# Altium PCB ebit_ad.PcbDoc (part 3 of 6)
Units mil, origin at the board's own origin, x right, y up, seen from the top; angles counter-clockwise.
Board outline 3958.82 x 3829.88 mil, 4 copper layers (Top Layer, MidLayer1, MidLayer2, Bottom Layer); 565 components, 392 nets, 1912 pads, 1242 vias.
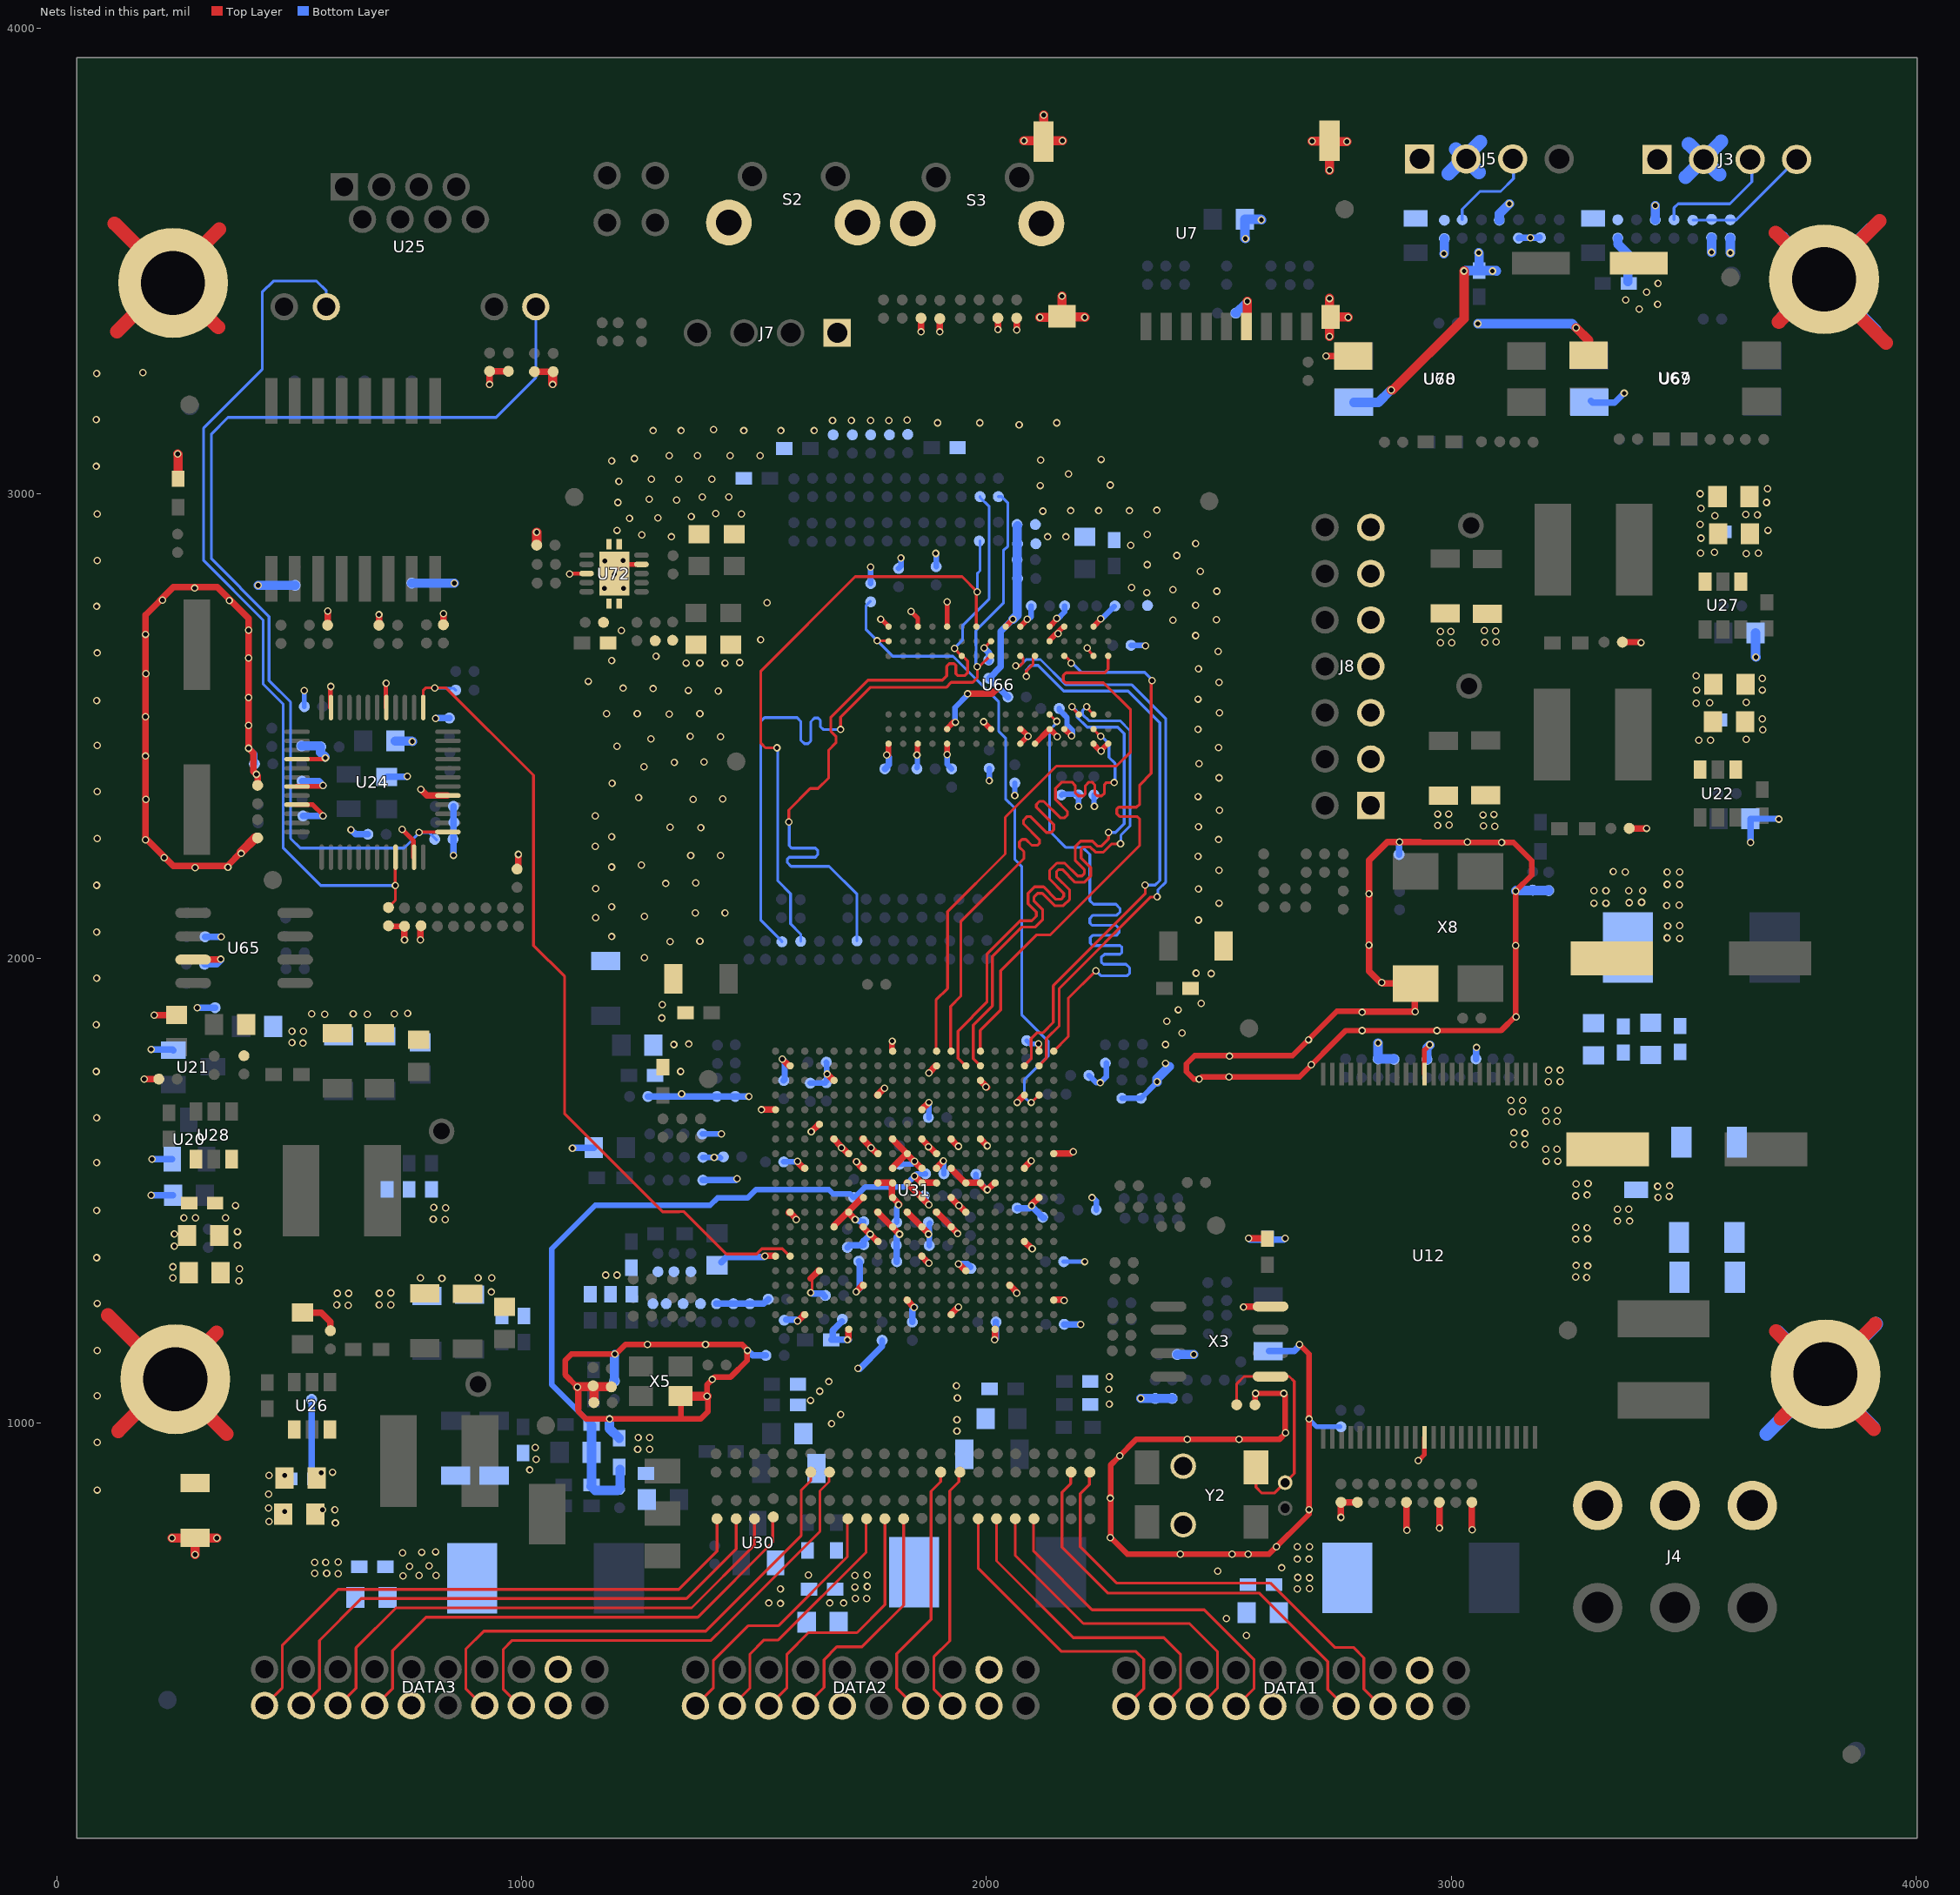
[diagram p5: the nets of this part, all layers, seen from the top]

## Via types
v1: diameter 16, hole 10, Top Layer to Bottom Layer, 1242 vias

## Nets (pads, with @x,y where several pads share a name; then routed paths per layer and width w, separated by ;. In a path a pad name is that pad's centre, name@x,y a point inside that pad or via, vN(x,y) a via of type N, cw(c..) or ccw(c..) an arc to the next point about the centre after c; other vN are vias at no path point) (continued)
DDR-DQ14_0: U31.H1 U66.B8 | length 1300.3
  Top Layer w6: U31.H1@1923.13,1800.2 1923.13,1896.55 1944.88,1918.31 1944.88,2078.74 2080.71,2214.57 2080.71,2229.33 2070.87,2239.17 2070.87,2250 2076.77,2255.91 2084.65,2255.91 2097.44,2243.11 2110.24,2243.11 2114.17,2247.05 2114.17,2254.92 2079.72,2289.37 2079.72,2297.24 2087.6,2305.12 2094.49,2305.12 2128.94,2270.67 2138.78,2270.67 2144.69,2276.57 2144.69,2287.4 2107.28,2324.8 2107.28,2330.71 2114.17,2337.6 2123.03,2337.6 2158.46,2302.17 2168.31,2302.17 2174.21,2308.07 2174.21,2315.94 2148.62,2341.54 2148.62,2365.16 2162.4,2378.94 2184.06,2378.94 2190.95,2372.05 2190.95,2356.3 2197.83,2349.41 2208.66,2349.41 2212.6,2353.35 2212.6,2371.06 2220.47,2378.94 2227.36,2378.94 2233.27,2373.03 2233.27,2354.33 2238.19,2349.41 2248.03,2349.41 2253.94,2355.31 2253.94,2374.02 2257.87,2377.95 v1(2274.61,2377.95) ; U66.B8@2230.32,2492.13 2245.08,2477.36 v1(2246.06,2477.36)
  Bottom Layer w6: v1(2246.06,2477.36) 2248.03,2477.36 2263.78,2461.61 2263.78,2432.09 2276.58,2419.29 v1@2276.58,2379.92
DDR-DQ15_0: U31.J1 U66.A3 | length 1294.5
  Top Layer w6: U31.J1@1891.47,1800.2 1891.47,1910.17 1916.34,1935.04 1916.34,2100.39 2040.35,2224.41 2040.35,2303.15 2150.59,2413.39 2279.53,2413.39 2310.04,2443.9 2310.04,2534.45 2251.97,2592.52 2170.28,2592.52 2165.35,2597.44 2165.35,2608.27 2171.26,2614.17 2253.94,2614.17 2261.81,2622.05 U66.A3@2261.81,2649.61
DDR-LDM_0: U31.A1 U66.E7 | length 1291.7
  Top Layer w6: U66.E7@2135.83,2524.61 2150.59,2509.84 v1(2151.58,2509.84) ; U31.A1@2144.69,1800.2 2176.18,1831.69 2176.18,1914.37 v1(2235.24,1973.42)
  Bottom Layer w6: v1@2150.59,2505.91 2135.83,2491.14 2135.83,2273.62 2171.26,2238.19 2207.68,2238.19 2222.44,2223.42 2222.44,2124.02 2230.32,2116.14 2278.54,2116.14 2287.4,2107.28 2287.4,2099.41 2280.51,2092.52 2229.33,2092.52 2222.44,2085.63 2222.44,2075.79 2227.36,2070.87 2278.54,2070.87 2285.43,2063.98 2285.43,2055.12 2279.53,2049.21 2228.35,2049.21 2223.43,2044.29 2223.43,2032.48 2228.35,2027.56 2287.4,2027.56 2291.34,2023.62 2291.34,2012.79 2287.4,2008.86 2253.94,2008.86 2247.05,2001.97 2247.05,1992.13 2251.97,1987.2 2300.2,1987.2 2308.07,1979.33 2308.07,1967.52 2303.15,1962.6 2246.06,1962.6 v1(2235.24,1973.42)
DDR-LDQS#_0: U31.B2 U66.G3 | length 1283.6
  Top Layer w6: v1(2062.99,2628.94) 2071.85,2628.94 2078.74,2635.83 2078.74,2646.65 U66.G3@2072.84,2652.56 ; U31.B2@2113.03,1768.75 2128.94,1784.66 2128.94,1826.77 2156.5,1854.33 2156.5,1935.04 2353.35,2131.89 v1(2367.13,2131.89)
  Bottom Layer w6: v1(2062.99,2628.94) 2071.85,2628.94 2085.63,2642.72 2116.14,2642.72 2170.28,2588.58 2312.01,2588.58 2385.83,2514.76 2385.83,2164.37 2369.09,2147.64 v1@2369.09,2133.86
DDR-LDQS_0: U31.C2 U66.F3 | length 1286.6
  Top Layer w6: U31.C2@2081.38,1768.75 2096.46,1783.83 2096.46,1809.07 2096.2,1809.32 2096.2,1827.5 2108.27,1839.57 2121.06,1839.57 2143.7,1862.2 2143.7,1940.94 2341.54,2138.78 v1(2341.54,2157.48) ; v1(2085.63,2606.3) 2085.63,2618.11 2100.39,2632.87 2100.39,2648.62 U66.F3@2104.33,2652.56
  Bottom Layer w6: v1@2085.63,2609.25 2085.63,2620.08 2095.47,2629.92 2111.22,2629.92 2166.34,2574.8 2305.12,2574.8 2373.03,2506.89 2373.03,2167.32 2363.19,2157.48 v1(2341.54,2157.48)
DDR-ODT_0: R2513.2 R2642.1 U66.K1 | length 1381.3
  Top Layer w6: v1(1549.21,2452.76) 1524.61,2452.76 1514.76,2462.6 1514.76,2618.11 1717.52,2820.87 1947.83,2820.87 v1(1980.32,2788.39) 1978.35,2786.42 U66.K1@1978.35,2713.58
  Bottom Layer w6: v1@1550.2,2454.72 1551.18,2453.74 1551.18,2166.34 1578.74,2138.78 1578.74,2073.82 1600.39,2052.16 R2513.2@1600.39,2036.42 ; v1@1982.28,2791.34 1980.32,2793.31 1980.32,2827.76 1986.22,2833.66 R2642.1@1986.22,2897.64
DDR-RAS_0: R2532.2 R2639.1 U66.J3 | length 1607.3
  Top Layer w6: v1(1686.02,2492.13) 1686.02,2518.7 1750,2582.68 1913.39,2582.68 1924.21,2593.5 1970.47,2593.5 1980.32,2603.35 v1(1980.32,2626.97) 1984.25,2626.97 U66.J3@2009.84,2652.56
  Bottom Layer w6: R2532.2@1560.04,2035.43 1560.04,2036.42 1514.76,2081.69 1514.76,2509.84 1522.64,2517.72 1592.52,2517.72 1600.39,2509.84 1600.39,2469.49 1608.27,2461.61 1616.14,2461.61 1622.05,2467.52 1622.05,2508.86 1629.92,2516.73 1637.8,2516.73 1642.72,2511.81 1642.72,2498.03 1648.62,2492.13 v1@1682.09,2492.13 ; v1@1980.32,2624.02 1977.36,2626.97 1977.36,2659.46 1977.61,2659.71 1977.61,2672.97 1977.36,2673.22 1977.36,2704.72 2036.42,2763.78 2036.42,2876.97 2046.26,2886.81 2046.26,2979.33 2032.48,2993.11 R2639.1@2025.59,2993.11
DDR-RESET_0: R2645.1 U31.B4 U66.T2 | length 1397.2
  Top Layer w6: v1(1764.76,2683.07) 1788.39,2683.07 U66.T2@1789.37,2684.05 ; v1(2096.46,1689.96) 2097.13,1689.96 U31.B4@2113.03,1705.86
  Bottom Layer w6: R2645.1@1750,2767.72 1741.14,2758.86 1741.14,2706.69 1798.23,2649.61 1928.15,2649.61 2026.58,2551.18 2026.58,2488.19 2041.09,2473.68 2041.09,2342.77 2061.02,2322.83 2061.02,2212.6 2075.79,2197.83 2075.79,1878.94 2132.87,1821.85 2132.87,1789.37 2081.44,1737.94 2081.44,1702.02 2093.5,1689.96 v1(2096.46,1689.96)
DDR-UDM_0: U31.F1 U66.D3 | length 1265.2
  Top Layer w6: U31.F1@1986.43,1800.2 1986.43,1844.7 2030.51,1888.78 2030.51,1973.42 2107.28,2050.2 2136.81,2050.2 2329.72,2243.11 2329.72,2299.21 2323.82,2305.12 2286.42,2305.12 2280.51,2311.02 2280.51,2320.87 2284.45,2324.8 2322.83,2324.8 2329.72,2331.69 2329.72,2373.03 2354.33,2397.64 v1@2354.33,2596.46 ; U66.D3@2167.32,2652.56 2182.09,2637.8 v1(2182.09,2634.84)
  Bottom Layer w6: v1(2182.09,2634.84) 2185.04,2634.84 2204.72,2615.16 2340.55,2615.16 v1@2357.28,2598.42
  other v1: 2356.3,2597.44
DDR-UDQS#_0: U31.F2 U66.B7 | length 1284.8
  Top Layer w6: U31.F2@1986.43,1768.75 1971.46,1783.72 1971.46,1856.3 2012.8,1897.64 2012.8,2003.94 2075.79,2066.93 2104.33,2066.93 2121.06,2083.66 2121.06,2104.33 2102.36,2123.03 2102.36,2131.89 2110.24,2139.76 2120.08,2139.76 2146.65,2113.19 2165.35,2113.19 2179.13,2126.97 2179.13,2146.65 2150.59,2175.2 2150.59,2186.02 2155.51,2190.94 2163.39,2190.94 2190.95,2163.39 2210.63,2163.39 2224.41,2177.16 2224.41,2194.88 2203.74,2215.55 2203.74,2235.24 2207.68,2239.17 2223.43,2239.17 2234.25,2228.35 2251.97,2228.35 2269.69,2246.06 v1@2286.42,2246.06 ; v1(2215.55,2541.34) 2215.55,2539.37 U66.B7@2230.32,2524.61
  Bottom Layer w6: v1(2215.55,2541.34) 2206.69,2532.48 2206.69,2524.61 2220.47,2510.83 2287.4,2510.83 2309.06,2489.17 2309.06,2284.45 2289.37,2264.76 v1@2289.37,2251.97
  other v1: 2288.39,2246.06
DDR-UDQS_0: U31.G2 U66.C7 | length 1294.4
  Top Layer w6: U31.G2@1954.78,1768.75 1938.72,1784.8 1938.72,1843.25 2000.98,1905.51 2000.98,2008.86 2072.83,2080.71 2097.44,2080.71 2107.28,2090.55 2107.28,2099.41 2089.57,2117.13 2089.57,2139.76 2103.35,2153.54 2123.03,2153.54 2149.61,2126.97 2160.43,2126.97 2166.34,2132.87 2166.34,2139.76 2135.83,2170.28 2135.83,2188.98 2151.57,2204.72 2168.31,2204.72 2195.87,2177.17 2205.71,2177.17 2210.63,2182.09 2210.63,2190.94 2190.95,2210.63 2190.95,2240.16 2202.76,2251.97 2228.35,2251.97 2239.17,2241.14 2247.05,2241.14 2262.8,2256.89 v1(2262.8,2270.67) ; v1(2184.06,2541.34) 2184.06,2539.37 U66.C7@2198.82,2524.61
  Bottom Layer w6: v1@2187.01,2539.37 2194.88,2531.5 2194.88,2518.7 2216.54,2497.05 2282.48,2497.05 2296.26,2483.27 2296.26,2289.37 2277.56,2270.67 v1(2262.8,2270.67)
DDR-WE_0: R2534.2 R2641.1 U66.L3 | length 1565.7
  Top Layer w6: v1(1574.8,2293.31) 1574.8,2318.9 1621.06,2365.16 1637.8,2365.16 1660.43,2387.79 1660.43,2447.83 1676.18,2463.58 1676.18,2477.36 1665.35,2488.19 1665.35,2518.7 1745.08,2598.42 1905.51,2598.42 1914.37,2607.28 1914.37,2627.95 1920.28,2633.86 1930.12,2633.86 1934.06,2629.92 1934.06,2612.2 1937.99,2608.27 1953.74,2608.27 1959.65,2614.17 1959.65,2639.76 1946.85,2652.56 1944.88,2652.56 v1(1931.1,2666.34)
  Bottom Layer w6: v1@1575.79,2290.35 1575.79,2242.13 1580.71,2237.2 1631.89,2237.2 1636.81,2232.28 1636.81,2222.44 1631.89,2217.52 1575.79,2217.52 1571.85,2213.58 1571.85,2205.71 1579.72,2197.83 1661.42,2197.83 1721.46,2137.79 R2534.2@1721.46,2037.4 ; v1@1932.09,2668.31 1948.82,2685.04 1948.82,2716.54 2005.91,2773.62 2005.91,2971.46 1986.22,2991.14 R2641.1@1986.22,2993.11
GND: C68.2 C69.2 C71.1 C73.1 C82.1 C93.1 C94.1 C147.2 C289.1 C290.1 C291.2 C292.2 C293.1 C294.1 C306.2 C307.2 C308.2 C309.2 C310.2 C319.2 C320.2 C321.2 C322.2 C323.2 C325.1 C362.1 C363.1 C364.1 C366.2 C367.2 C368.2 C369.2 C370.2 C371.2 C372.2 C373.2 C374.2 C375.2 C376.2 C377.1 C379.1 C379A.1 C380.2 C382.2 C383.2 C384.1 C385.2 C386.2 C387.2 C389.1 C390.1 C391.2 C392.1 C394.1 C395.1 C396.2 C397.2 C398.1 C399.2 C401.1 C402.2 C403.1 C538.2 C625.2 C626.2 C628.2 C659.1 C660.1 C663.2 C665.2 C666.1 C667.2 C668.1 C669.1 C670.2 C671.1 C672.1 C673.2 C674.1 C845.1 C846.1 C1887.2 C1987.1 C2250.1 C2269.2 C2280.2 C2285.1 C2287.1 C2288.1 C2291.1 C2292.2 C2293.2 C2294.2 C2295.1 C2296.2 C2297.1 C2298.2 C2299.1 C2302.2 C2304.1 C2305.1 C2306.1 C2307.2 C2308.1 C2309.1 C2310.2 C2312.1 C2313.2 C2314.2 C2315.2 C2316.2 C2317.1 C2318.2 C2319.1 C2320.2 C2321.1 C2322.1 C2323.1 C2324.2 C2325.2 C2326.2 C2327.2 C2328.1 C2329.1 C2330.2 C2331.2 C2332.1 C2333.1 C2334.1 C2335.2 C2336.1 C2337.2 C2338.2 C2339.2 C2340.1 C2341.1 C2342.2 C2343.1 C2344.2 C2345.2 C2346.2 C2347.1 C2349.1 C2349A.2 C2350.1 C2351.2 C2352.2 C2353.1 C2354.2 C2355.2 C2356.1 C2357.1 C2358.2 C2359.1 C2360.1 C2361.1 C2362.2 C2363.1 C2365.1 C2366.2 C2367.2 C2368.2 C2369.2 C2370.2 C2371.2 C2372.2 C2373.1 C2374.2 C2375.2 C2376.2 C2377.1 C2378.2 C2379.2 C2381.1 C2382.2 C2384.1 C2394.2 C2395.2 C2396.1 C2397.1 C2398.2 C2399.2 C2400.1 C2401.2 C2402.1 C2403.2 C2404.2 C2405.2 C2406.2 C2407.2 C2408.2 C2409.2 C2410.1 DATA1.3 DATA1.4 DATA1.12 DATA2.3 DATA2.4 DATA2.12 DATA3.3 DATA3.4 DATA3.12 FB14.1 J7.1 J8.1 J8.3 J8.5 J8.7 J8.9 J8.11 J8.13 L36.2 LED1.2 LED4.2 R120A.1 R244.1 R246.1 R248.1 R277.1 R1336.2 R1381.1 R1383.1 R1386.1 R1389.1 R1390.1 R1392.1 R1393.2 R1396.2 R1412.1 R1415.2 R1418.2 R1421.2 R1483.2 R1497.1 R1498.1 R1499.1 R1949.1 R2161.1 R2389.2 R2433.2 R2455.2 R2456.2 R2459.1 R2512.1 R2538.2 R2541.2 R2558.2 R2560.2 R2584.2 R2585.1 R2586.2 R2587.2 R2588.1 R2590.2 R2598.2 R2616.2 R2645.2 R2648.1 S2.1 S2.2 S3.1 S3.2 U7.6 U7.10 U7.11 U7.12 U7.13 U12.13 U12.36 U20.2 U21.2 U22.1 U24.11 U24.17 U24.29 U24.35 U24.40 U24.43 U24.45 U26.1 U27.1 U28.1 U30.1 U31.A8 U31.A18 U31.B1 U31.B11 U31.C4 U31.C9 U31.C14 U31.D17 U31.E10 U31.E20 U31.F3 U31.F7 U31.F10 U31.G10 U31.G12 U31.G16 U31.H7 U31.H9 U31.H11 U31.H13 U31.H19 U31.J2 U31.J8 U31.J12 U31.K5 U31.K7 U31.K9 U31.K11 U31.K13 U31.K15 U31.L8 U31.L10 U31.L12 U31.L18 U31.M1 U31.M7 U31.M9 U31.M10 U31.M11 U31.M13 U31.N4 U31.N8 U31.N10 U31.N12 U31.N14 U31.P7 U31.P9 U31.P11 U31.P13 U31.P17 U31.R8 U31.R12 U31.R20 U31.T3 U31.T7 U31.T13 U31.U6 U31.U16 U31.V9 U31.V19 U31.W2 U31.W12 U31.Y5 U31.Y15 U65.3 U66.A9 U66.B1 U66.B3 U66.B9 U66.D1 U66.D8 U66.E1 U66.E2 U66.E8 U66.F9 U66.G1 U66.G8 U66.G9 U66.J2 U66.J8 U66.M1 U66.M9 U66.P1 U66.P9 U66.T1 U66.T9 U67.3 U68.3 U72.4 U72.8 U72.11 U72.12 U72.13 U72.14 U72.15 X3.4 X5.4 X8.2 Y2.5 Y2.6 | length 16151
  Top Layer w6: v1@1622.05,1283.46 v1@1625,1280.51 ; v1@1625,1284 1625,1311.56 ; v1(1995.08,2667.32) 2009.84,2682.09 U66.J2@2009.84,2684.05 ; v1@2215.55,2666.34 2229.33,2652.56 U66.B3@2230.32,2652.56
  Top Layer w8: v1(1103.35,2826.77) 1104.33,2827.76 U72.8@1138.78,2827.76
  Top Layer w10: U24.45@515.75,2330.44 550.47,2330.44 572.83,2308.07 v1(572.83,2306.1) ; U24.43@515.75,2369.63 570.42,2369.63 v1(572.83,2372.05) ; U24.40@515.75,2428.42 575.07,2428.42 v1(577.76,2431.1) ; U24.35@588.76,2539.37 588.76,2583.84 v1(589.57,2584.65) ; U24.29@707.95,2539.37 707.95,2590.82 v1(708.66,2591.53) ; v1(743.11,2277.56) 743.11,2276.57 767.54,2252.15 U24.11@767.54,2217.52 ; U72.15@1218.5,2847.44 U72.4@1256.89,2847.44 ; U31.R20@1701.57,1202.76 U31.R20@1702.76,1201.57 ; v1(1772.64,2729.33) 1773.62,2729.33 U66.T1@1789.37,2713.58 ; v1(1837.6,2746.06) 1852.36,2731.3 U66.P1@1852.36,2713.58 ; v1@1914.37,2767.72 v1(1915.35,2766.73) U66.M1@1915.36,2713.58 ; v1(2929.13,919.29) 2942.36,932.51 U12.36@2942.36,969.49 ; U12.13@2942.36,1750.98 2942.36,1802.59 v1(2953.74,1813.98)
  Top Layer w12: R1390.1@713.58,2069.88 714.57,2068.9 R1392.1@748.03,2068.9 ; v1@1119.09,1078.74 1093.5,1104.33 1093.5,1134.84 1107.28,1148.62 1202.76,1148.62 1223.43,1169.29 1474.41,1169.29 1485.24,1158.46 1485.24,1134.84 1449.8,1099.41 1415.35,1099.41 1398.62,1082.68 v1(1398.62,1058.07) ; 1122.05,1030.51 1122.05,1025.59 1138.78,1008.86 1343.57,1008.86 1384.84,1008.86 1400.59,1024.61 1400.59,1055.12 v1@1398.62,1057.09 ; X5.4@1341.54,1053.15 X5.4@1343.57,1051.12 ; 1342.52,1008.86 X5.4@1342.52,1051.12 ; v1(1785.52,2437.13) 1788.27,2437.13 1788.39,2437.01 1789,2437.62 1789,2449.14 1789.37,2449.51 U66.T9@1789.37,2461.61 ; U31.M1@1796.52,1800.2 1796.52,1821.13 v1@1797.24,1821.85 ; v1(1850.48,2437.13) 1851.26,2437.13 1851.38,2437.01 1851.38,2460.63 U66.P9@1852.36,2461.61 ; v1(1915.35,2437.99) U66.M9@1915.36,2461.61 ; v1@1995.08,2509.84 1995.08,2506.89 U66.J8@2009.84,2492.13 ; U66.G8@2071.85,2493.11 2074.8,2493.11 2089.57,2478.35 U66.G9@2072.84,2461.61 ; U66.G1@2072.84,2713.58 2087.6,2728.35 v1(2087.6,2729.33) ; U66.F9@2104.33,2461.61 2134.84,2492.13 2137.8,2492.13 v1@2151.58,2478.35 ; U31.B1@2113.03,1800.2 v1@2113.03,1815.12 ; U66.E2@2135.83,2684.05 2165.35,2713.58 U66.D1@2167.32,2713.58 ; U66.E1@2135.83,2713.58 2151.58,2729.33 v1(2151.57,2731.3) ; U66.D8@2167.32,2492.13 2169.29,2492.13 v1(2183.07,2478.35) ; U66.B9@2230.32,2461.61 2230.32,2460.63 2245.08,2445.87 2260.83,2461.61 U66.A9@2261.81,2461.61 ; U66.B1@2230.32,2713.58 2246.06,2729.33 v1(2246.06,2730.31) ; C69.2@2577.76,1039.37 2577.76,1062.99 v1(2578.74,1063.98) v1(2639.76,1063.98) 2642.72,1061.02 2642.72,977.36 2630.91,965.55 2322.83,965.55 2283.46,926.18 2267.72,910.43 2267.72,753.94 2303.15,718.5 2608.27,718.5 2693.9,804.13 2693.9,1148.62 v1(2673.23,1169.29) ; v1@2805.12,1885.83 2753.94,1885.83 2658.46,1790.35 2447.83,1790.35 2430.12,1772.64 2430.12,1755.91 2445.87,1740.16 v1(2457.68,1740.16) 2462.6,1745.08 2673.23,1745.08 2772.64,1844.49 3107.28,1844.49 3138.78,1875.98 v1(3138.78,2144.68) 3173.23,2179.13 3173.23,2209.65 3133.86,2249.02 2934.06,2249.02 2933.07,2250
  Top Layer w14: v1(209.65,1877.95) C628.2@257.87,1877.95 ; U65.3@293.31,1997.05 351.38,1997.05 v1(352.36,1998.03) ; v1@396.65,2228.35 367.13,2198.82 250.98,2198.82 190.94,2258.86 190.94,2738.19 250.98,2798.23 345.47,2798.23 412.4,2731.3 v1(412.4,2451.77) 423.23,2440.94 423.23,2401.57 v1(429.13,2395.67) 432.09,2392.72 C380.2@432.09,2372.05 ; C386.2@527.56,1237.2 568.9,1237.2 588.58,1217.52 R1415.2@588.58,1198.82 ; C366.2@582.68,2716.54 v1(582.68,2747.05) ; C372.2@692.91,2716.54 v1(692.91,2739.17) ; v1(748.03,2039.37) R1392.1@748.03,2068.9 ; v1(782.48,2039.37) R1386.1@782.48,2069.88 ; v1(783.46,2363.19) 796.62,2350.04 U24.17@840.55,2350.04 ; R1393.2@831.69,2717.52 v1(831.69,2741.14) ; v1@930.12,3233.27 v1(931.1,3234.25) R1389.1@931.1,3262.79 C659.1@970.47,3262.79 ; R2560.2@993.11,2191.93 v1(993.11,2223.42) ; C660.1@1025.59,3261.81 R1412.1@1067.91,3261.81 ; v1(1120.08,1077.76) 1122.05,1075.79 1122.05,1030.51 ; v1(1515.75,1674.21) 1515.96,1674.42 U31.Y5@1543.31,1674.42 ; v1@1521.65,1359.25 1522.38,1359.98 U31.Y15@1543.31,1359.98 ; v1(1561.02,1783.46) 1561.02,1782.69 U31.W2@1574.96,1768.75 ; U31.W12@1575,1453 U31.W12@1576.24,1453 ; U31.W12@1576.2,1454.31 v1@1591.54,1438.98 ; v1@1593.5,1218.5 1606.61,1231.61 U31.V19@1606.61,1234.2 ; v1(1593.5,1562.99) 1593.5,1561.75 U31.V9@1606.61,1548.64 ; 1622.05,1311.02 1638.26,1327.24 U31.U16@1638.26,1328.53 ; v1(1623.03,1626.97) 1638.26,1642.2 U31.U6@1638.26,1642.98 ; v1(1657.48,1750.98) 1669.91,1738.55 U31.T3@1669.91,1737.31 ; U31.T7@1669.91,1611.53 1670.95,1611.53 1687.99,1594.49 1701.57,1580.91 U31.R8@1701.57,1580.09 ; U31.T13@1672.24,1423.23 1672.24,1424.78 U31.P11@1733.22,1485.75 ; U31.R12@1701.57,1454.31 1716.9,1438.98 v1@1717.52,1438.98 ; v1@1702.76,1180.12 U31.R20@1702.76,1201.57 ; v1@1718.5,1562.99 1718.87,1562.99 U31.P9@1733.22,1548.64 ; v1(1719.49,1282.48) 1733.22,1296.21 U31.P17@1733.22,1297.09 ; U31.P13@1733.22,1422.87 1763.37,1392.72 U31.N14@1764.76,1392.72 ; U31.P7@1733.22,1611.53 1750.98,1593.76 1750.98,1593.5 1764.4,1580.09 U31.N8@1764.87,1580.09 ; U31.N12@1764.87,1454.31 1812.68,1406.5 v1(1812.99,1406.5) ; U31.N10@1764.87,1517.2 1796.78,1517.2 U31.M10@1797.24,1516.73 ; U31.N4@1764.87,1705.86 1779.48,1720.47 v1@1779.53,1720.47 ; U31.M10@1796.52,1517.2 1796.52,1486.94 v1@1812.99,1470.47 ; U31.M9@1796.52,1548.64 1796.73,1548.64 U31.L8@1828.17,1580.09 ; U31.M7@1796.52,1611.53 1859.41,1548.64 U31.K9@1859.82,1548.64 ; U31.L18@1828.17,1265.65 1828.17,1265.33 v1(1844.49,1249.02) ; U31.L12@1828.17,1454.31 1875,1407.48 v1(1875,1406.5) ; U31.L10@1828.17,1517.2 1875.88,1469.49 v1(1875.98,1469.49) ; v1(1859.25,3347.44) R120A.1@1859.25,3376.97 ; U31.K15@1859.82,1359.98 1875.31,1344.49 v1(1875.98,1344.49) ; U31.K7@1859.82,1611.53 1890.65,1580.71 U31.J8@1890.75,1580.71 ; U31.K5@1859.82,1674.42 1860.44,1674.42 v1(1875.98,1689.96) ; v1(1875.98,1752.95) 1875.98,1753.26 U31.J2@1891.47,1768.75 ; U31.J12@1891.47,1454.31 1892.15,1454.31 v1@1937.5,1408.96 ; v1(1899.61,3347.44) C73.1@1899.61,3375.98 ; U31.H19@1923.13,1234.2 1923.18,1234.2 v1@1938.98,1250 ; U31.H11@1923.13,1485.75 1937.99,1470.89 1937.99,1469.49 1939.6,1469.49 U31.G12@1954.78,1454.31 ; U31.H9@1923.13,1548.64 1954.05,1517.72 1984.25,1517.72 2000,1501.97 v1(2001.97,1501.97) U31.E10@2016.73,1516.73 ; U31.H7@1923.13,1611.53 1939.18,1595.47 v1(1939.96,1595.47) ; v1(1939.96,1342.52) 1940.79,1342.52 U31.G16@1954.78,1328.53 ; U31.F7@1986.43,1611.53 2001.5,1596.46 v1(2001.97,1596.46) ; U31.F3@1986.43,1737.31 2001.3,1722.44 v1@2001.97,1722.44 ; v1(2017.72,1179.13) 2018.08,1179.5 U31.E20@2018.08,1202.76 ; v1(2024.61,3352.36) C2410.1@2024.61,3376.97 ; U31.D17@2049.73,1297.09 2065.95,1280.88 v1@2065.95,1280.51 ; v1(2064.96,3351.38) R2648.1@2064.96,3376.97 ; v1(2065.94,1689.96) 2065.95,1690.43 U31.C4@2081.38,1705.86 ; U31.C14@2081.38,1391.42 2097.8,1375 v1(2098.42,1375) ; U31.C9@2081.38,1548.64 2081.38,1548.9 v1(2096.46,1563.98) ; v1@2097.44,1470.47 2112.72,1485.75 U31.B11@2113.03,1485.75 ; U31.A18@2144.69,1265.65 2167.22,1265.65 v1@2167.32,1265.75 ; U31.A8@2144.69,1580.09 2181.47,1580.09 v1@2186.02,1584.65 ; v1(2553.15,1250) 2554.13,1250.98 X3.4@2611.22,1250.98 ; v1(2563.98,1397.64) 2603.35,1397.64 C670.2@2604.33,1396.65 ; v1(2730.31,3295.28) U68.3@2789.37,3295.28 ; v1(2762.8,797.24) R248.1@2762.8,829.72 R2588.1@2798.23,829.72 ; v1@2807.09,1884.84 v1(2922.24,1884.84) 2921.26,1885.83 2921.26,1943.9 X8.2@2923.23,1945.87 2852.36,1945.87 v1(2850.39,1947.83) 2847.44,1947.83 2822.83,1972.44 2822.83,2210.63 2862.2,2250 2933.07,2250 ; R2585.1@2903.54,829.72 2903.54,770.67 v1(2904.53,769.68) ; v1(2974.41,774.61) R246.1@2974.41,829.72 ; R244.1@3044.29,829.72 3044.29,771.65 v1(3045.28,770.67) ; R1418.2@3368.11,2680.12 3407.48,2680.12 v1(3408.46,2679.13) ; R1336.2@3382.87,2279.53 v1(3420.28,2279.53)
  Top Layer w20: v1(248.03,752.95) C325.1@297.24,752.95 ; v1(259.84,3084.65) 260.83,3083.66 LED4.2@260.83,3031.5 ; v1(297.24,717.52) C325.1@297.24,752.95 ; v1(344.49,752.95) C325.1@297.24,752.95 ; v1@396.65,2228.35 427.17,2258.86 C377.1@432.09,2258.86 ; C2400.1@1032.48,2888.78 v1(1032.48,2916.34) ; v1@1066.93,3236.22 1066.93,3260.83 R1412.1@1067.91,3261.81 ; v1(1120.08,1077.76) 1121.06,1078.74 C362.1@1193.9,1078.74 ; C364.1@1154.53,1078.74 1155.51,1077.76 R277.1@1155.51,1044.29 ; X5.4@1341.54,1058.07 v1(1398.62,1058.07) ; v1(2080.71,3758.86) 2121.06,3758.86 U7.12@2123.03,3756.89 ; v1(2115.16,3378.94) 2161.42,3378.94 U7.13@2162.4,3379.92 ; v1(2123.03,3813.98) U7.12@2123.03,3756.89 ; v1(2162.4,3424.21) U7.13@2162.4,3379.92 ; v1(2163.39,3758.86) 2125,3758.86 U7.12@2123.03,3756.89 ; v1(2211.61,3378.94) 2210.63,3379.92 U7.13@2162.4,3379.92 ; U7.6@2559.42,3359.25 2561.02,3360.85 v1(2561.02,3413.39) ; v1(2700.79,3757.87) 2737.2,3757.87 U7.11@2738.19,3758.86 ; v1(2738.19,3337.6) 2738.19,3377.95 U7.10@2740.16,3379.92 ; v1(2738.19,3419.29) 2738.19,3381.89 U7.10@2740.16,3379.92 ; v1(2738.19,3694.88) U7.11@2738.19,3758.86 ; v1(2775.59,3756.89) 2740.16,3756.89 U7.11@2738.19,3758.86 ; v1(2778.54,3378.94) 2777.56,3379.92 U7.10@2740.16,3379.92 ; v1(3268.7,3356.3) 3295.28,3329.72 U67.3@3295.28,3297.24
  Bottom Layer w10: C367.2@532.48,2541.34 v1(532.48,2575.79) ; C2293.2@2086.61,1822.83 2093.5,1815.94 v1(2112.2,1815.94) ; C674.1@2166.34,1347.44 v1(2211.61,1347.44) ; v1(2693.9,1008.86) 2710.63,992.13 R2584.2@2760.83,992.13
  Bottom Layer w12: R1498.1@1388.78,1622.05 v1(1430.12,1622.05) ; R1497.1@1389.76,1571.85 1414.37,1571.85 1427.17,1571.85 C667.2@1428.15,1570.87 ; C668.1@1563.98,1562.01 1594.49,1562.01 v1@1595.47,1562.99 ; C2280.2@1621.06,1731.3 1652.56,1731.3 1656.5,1735.24 1656.5,1775.59 C2299.1@1655.51,1776.57 ; R2645.2@1750.98,2806.1 v1(1750.98,2841.53) ; C2342.2@1807.09,1432.09 1807.09,1463.58 v1@1811.02,1467.52 ; C2382.2@1811.02,2838.58 1815.95,2843.5 v1(1815.94,2861.22) ; C2347.1@1812.99,1557.09 1840.55,1557.09 v1@1844.49,1561.02 ; C2375.2@1850.39,2410.43 1851.38,2411.42 1851.38,2437.01 1851.26,2437.13 v1(1850.48,2437.13) ; v1@1875,1686.02 v1@1876.97,1687.99 ; R2456.2@1875.98,1656.5 v1@1875.98,1685.04 ; C2346.2@1876.97,1381.89 1876.97,1429.13 C2335.2@1877.95,1430.12 ; v1(1890.75,2871.06) 1891.73,2870.08 C2376.2@1891.73,2842.52 ; v1(1915.35,2437.99) 1915.35,2417.32 R2455.2@1925.2,2407.48 ; C2350.1@1977.36,1535.43 1977.36,1526.57 v1@1997.05,1506.89 ; v1(2005.91,2381.89) C2368.2@2005.91,2408.46 ; v1(2061.02,2350.39) C2378.2@2061.02,2376.97 ; v1@2088.58,2727.36 2096.46,2735.24 C2369.2@2096.46,2757.87 ; v1@2153.54,2730.31 2168.31,2745.08 C2371.2@2168.31,2757.87 ; C2250.1@2156.5,2537.4 2156.5,2534.45 2173.23,2517.72 2173.23,2501.97 2185.04,2490.16 v1@2185.04,2481.3 ; C2372.2@2161.42,2351.38 2163.39,2353.35 C2367.2@2194.88,2353.35 ; v1(2197.83,2326.77) C2367.2@2197.83,2351.38 ; C2291.1@2220.47,1748.03 2236.22,1732.28 v1(2245.08,1732.28) 2257.87,1745.08 C2297.1@2257.87,1774.61 ; v1@2227.36,1487.2 2236.22,1478.35 C671.1@2236.22,1458.66 ; C2379.2@2231.3,2351.38 2231.3,2327.76 v1(2232.28,2326.77) ; v1(2246.06,2730.31) 2248.03,2730.31 C2381.1@2274.61,2756.89 ; C2304.1@2291.34,1698.82 R2459.1@2332.68,1698.82 2367.13,1733.27 v1(2367.13,1734.25) ; C2373.1@2311.02,2673.23 2341.54,2673.23 v1(2342.52,2672.24)
  Bottom Layer w14: v1(202.76,1490.16) C625.2@250,1490.16 ; v1(202.76,1804.13) 249.02,1804.13 U21.2@250.98,1802.17 ; v1(204.72,1567.91) U20.2@248.03,1567.91 ; R1949.1@317.91,1987.2 344.49,1987.2 v1@353.35,1996.06 ; C1887.2@318.9,2046.26 v1(353.35,2046.26) ; v1(412.4,2451.77) 425.2,2438.98 C376.2@425.2,2418.31 ; C370.2@527.56,2380.91 563.98,2380.91 v1@573.82,2371.06 ; C374.2@529.53,2306.1 v1(572.83,2306.1) v1@573.82,2305.12 ; v1(632.87,2276.57) 642.72,2266.73 C382.2@669.29,2266.73 ; C379.1@709.65,2389.76 710.63,2390.75 v1@751.97,2390.75 ; v1(814.96,2515.75) 815.95,2516.73 R1396.2@844.49,2516.73 ; v1(853.35,2221.46) R1381.1@853.35,2326.77 ; v1(1109.25,1591.53) 1110.24,1592.52 C663.2@1155.51,1592.52 ; C672.1@1271.65,1702.76 R2161.1@1420.28,1702.76 v1(1489.17,1702.76) ; R1499.1@1389.76,1522.64 1460.63,1522.64 v1(1463.58,1525.59) ; C2359.1@1418.31,1256.89 1520.67,1256.89 C2313.2@1530.51,1266.73 ; C2349.1@1430.12,1346.46 1440.94,1357.28 1521.65,1357.28 v1(1523.62,1359.25) ; v1(1486.22,1156.5) 1497.05,1145.67 C2310.2@1525.59,1145.67 ; v1(1561.02,1783.46) 1565.95,1778.54 1565.95,1739.17 C2296.2@1563.98,1737.2 ; C2307.2@1568.9,1222.44 1590.55,1222.44 v1(1593.5,1219.49) ; v1@1625,1278.54 1646.65,1278.54 R2541.2@1652.56,1272.64 ; C2308.1@1688.98,1218.5 1669.29,1198.82 1669.29,1182.09 C2309.1@1666.34,1179.13 v1@1703.74,1179.13 ; C2334.1@1700.79,1377.95 1705.71,1382.87 1733.27,1382.87 C2326.2@1735.24,1384.84 ; v1(1717.52,1437.99) C2339.2@1734.79,1432.7 ; v1(1719.49,1282.48) 1727.36,1290.35 1727.36,1346.46 C2318.2@1725.39,1348.42 ; v1@1727.36,1117.13 1775.59,1165.35 C2314.2@1775.59,1178.15 ; C2326.2@1736.22,1383.86 1736.22,1391.73 v1@1749.02,1404.53 ; C2374.2@1781.5,2407.48 1790.35,2416.34 v1@1790.35,2433.07 ; C2320.2@1807.09,1347.44 1807.09,1400.59 v1(1812.99,1406.5) ; C2317.1@1840.55,1217.52 1840.55,1244.09 v1@1846.46,1250 ; C2354.2@1866.14,1489.17 1866.14,1480.31 v1@1875,1471.46 ; v1(1939.96,1342.52) 1958.66,1342.52 C147.2@1965.55,1335.63 ; v1(1995.08,2667.32) 2004.92,2657.48 C2302.2@2004.92,2638.78 ; v1(2017.72,1179.13) 2020.67,1182.09 C2322.1@2020.67,1217.52 ; R2512.1@2065.95,1462.6 2092.52,1462.6 v1(2097.44,1467.52) ; v1@2097.44,1466.54 2122.05,1441.93 R2433.2@2124.02,1441.93 ; C2323.1@2167.32,1212.6 2200.79,1212.6 v1@2201.77,1213.58 ; v1(2563.98,1397.64) 2566.93,1394.68 2639.76,1394.68 v1(2642.72,1397.64) ; C669.1@2608.27,1155.51 2662.4,1155.51 v1@2674.21,1167.32 ; R2389.2@2887.8,2223.42 v1@2887.8,2249.02 ; R2590.2@3053.15,1783.46 3053.15,1807.09 v1(3054.13,1808.07) ; v1(3643.7,2249.02) C294.1@3643.7,2300.2 3703.74,2300.2 v1(3704.72,2299.21)
  Bottom Layer w20: v1(433.07,2802.16) C375.2@512.8,2802.16 ; C369.2@526.57,2456.69 564.96,2456.69 566.93,2454.72 566.93,2442.91 v1@576.77,2433.07 ; C371.2@728.35,2467.52 763.78,2467.52 v1(764.76,2466.53) ; C373.2@763.78,2807.09 v1(855.31,2807.09) ; v1@1188.98,1006.89 1188.98,988.19 FB14.1@1209.65,967.52 ; C363.1@1199.8,1090.55 1199.8,1146.65 v1@1200.79,1147.64 ; v1@2331.69,1053.15 C538.2@2399.61,1053.15 ; v1@2367.13,1733.27 2367.13,1741.04 2393.09,1767 ; C71.1@2410.43,1147.64 v1@2445.87,1147.64 ; C94.1@2536.42,3387.79 2537.4,3387.79 v1@2559.06,3409.45 ; v1(2557.09,3548.23) 2556.1,3549.21 C93.1@2556.1,3589.57 2590.55,3589.57 v1(2591.54,3588.58) ; v1(2842.52,1817.91) R2586.2@2842.52,1783.46 R2587.2@2875.98,1783.46 ; R2598.2@2947.83,1782.48 2947.83,1807.09 v1@2953.74,1812.99 ; v1(3057.09,3365.16) 3259.84,3365.16 v1(3268.7,3356.3) ; v1(3138.78,2144.68) 3139.76,2145.67 C2285.1@3209.65,2145.67 ; C395.1@3654.53,2699.8 3654.53,2648.62 v1(3655.51,2647.64)
  other v1: 2559.38,543.17 2516.09,579.58 1556.69,612.05 1532.09,613.03 1556.69,643.54 1616.71,673.06 605.16,676.01 554.98,676.99 580.56,676.99 2497.39,681.91 554.98,700.61 578.59,700.61 605.16,701.59 2417.32,718.5 2528.54,718.5 2562.99,718.5 2624.16,734.4 2266.73,753.94 456.58,788.18 490.03,809.83 2693.9,813.98 455.59,817.7 2266.73,838.58 455.59,847.22 456.58,887.57 490.03,887.57 1017.46,899.38 1031.23,922.01 2287.19,929.91 1249.68,943.66 1275.26,943.66 1029.26,947.59 2432.09,965.55 2543.31,965.55 1250.66,969.24 1275.26,969.24 2643.7,979.33 1936.51,983.02 1666.9,998.76 1936.51,1007.62 1188.98,1008.86 1686.58,1018.44 2264.18,1041.07 1621.63,1048.94 2331.69,1053.15 1937.5,1053.86 1641.31,1068.62 2263.2,1072.56 1935.53,1080.43 1660.99,1089.29 1409.96,1094.01 2264.18,1100.11 1723.43,1117.72 2445.87,1147.64 1200.79,1148.62 1270.67,1169.29 1395.67,1169.29 1700.79,1179.13 2202.76,1212.6 1939.96,1250 626.81,1253.62 602.21,1254.6 693.72,1254.6 718.32,1254.6 2167.32,1263.78 603.19,1279.2 627.79,1279.2 693.72,1279.2 718.32,1280.18 2064.96,1279.53 1622.05,1280.51 934.8,1282.15 828.53,1311.67 249.94,1312.66 782.28,1312.66 906.26,1312.66 935.78,1312.66 1180.8,1318.56 1205.4,1318.56 249.94,1336.27 252.89,1380.55 1750,1406.5 252.89,1407.12 1937.99,1407.48 835.42,1437.62 1590.63,1438.06 809.83,1438.61 273.55,1441.56 298.15,1441.56 836.4,1463.21 810.82,1464.19 1940.94,1467.52 1811.02,1469.49 2227.36,1485.24 1720.47,1562.01 1845.47,1562.99 3203.9,1563.58 3229.49,1563.58 1414.37,1571.85 2187.01,1583.66 3202.92,1589.16 3227.52,1589.16 1687.99,1592.52 1751.97,1592.52 1875,1594.49 3134.04,1599.98 3158.64,1599.98 3158.64,1623.6 3135.02,1624.58 3203.9,1649.18 3227.52,1649.18 3130.1,1669.85 3153.72,1670.83 3202.92,1672.8 3229.49,1672.8 3128.14,1694.45 3153.72,1694.45 1344.14,1708.22 1780.51,1720.47 1999.02,1723.42 3208.82,1734.79 3234.41,1734.79 2521.65,1745.08 1342.18,1756.44 3209.81,1759.39 3234.41,1759.39 2698.98,1770.83 2385.22,1774.15 2522.64,1789.37 1327.42,1814.5 2385.22,1814.5 1359.89,1815.48 529.39,1817.45 505.78,1818.43 1797.24,1821.85 2692.81,1824.7 2420.64,1839.1 505.78,1843.03 530.38,1843.03 2808.07,1844.49 2969.49,1844.49 2388.17,1864.68 1301.83,1871.57 3139.76,1874.02 576.62,1879.44 668.14,1879.44 548.09,1880.42 637.63,1880.42 726.19,1880.42 754.73,1881.41 2808.07,1883.86 2412.77,1889.28 1302.82,1900.1 2461.97,1903.06 2483.62,1967.02 2451.14,1968 1264.44,2001.46 3138.78,2027.56 2822.83,2028.54 1319.54,2035.9 1383.5,2036.88 1193.59,2046.72 2456.06,2082.14 1159.15,2087.06 1264.44,2090.02 1373.66,2097.89 1437.62,2097.89 1193.59,2110.68 2500.34,2118.55 2822.83,2138.78 2456.06,2149.06 1159.15,2150.04 1309.7,2160.86 1374.65,2161.85 2500.34,2189.4 297.24,2194.88 368.11,2195.87 1193.59,2196.29 1257.55,2200.22 231.3,2216.53 2455.08,2218.92 1363.82,2220.89 1427.78,2220.89 396.65,2225.39 1158.17,2240.57 3108.27,2249.02 2888.78,2250 3034.45,2250 190.94,2254.92 2499.36,2255.33 1193.59,2261.23 1385.47,2280.91 1319.54,2281.9 2456.06,2282.88 3093.7,2283.86 3069.1,2284.85 2970.7,2285.83 2995.3,2286.82 1158.17,2306.5 3068.11,2308.46 3091.73,2309.45 2970.7,2310.43 2994.31,2310.43 2501.33,2318.3 191.93,2341.53 1368.74,2341.92 1432.7,2342.9 1251.65,2345.86 2455.08,2347.82 1194.58,2376.36 2500.34,2388.17 753.94,2391.73 1263.46,2411.78 2457.05,2418.67 1328.4,2421.62 1392.36,2422.61 190.94,2435.04 2247.05,2445.87 2499.36,2453.11 1205.4,2456.06 3634.9,2470.82 1278.22,2471.81 2152.56,2476.38 1427.78,2476.73 2089.57,2477.36 1362.84,2477.71 3670.32,2491.49 2455.08,2492.47 412.4,2500.98 1994.09,2508.86 3669.34,2515.1 190.94,2519.68 1317.58,2524.94 1182.77,2525.93 1248.7,2525.93 1383.5,2525.93 2501.33,2527.9 3634.9,2550.53 2455.08,2557.42 412.4,2561.02 1422.86,2575.13 1358.9,2576.11 3669.34,2577.1 1283.14,2580.05 1218.19,2581.03 2500.34,2593.82 1143.41,2595.79 3669.34,2601.7 191.93,2612.2 2456.06,2622.36 1353.98,2635.15 1383.5,2635.15 1437.62,2635.15 1469.11,2636.14 1193.59,2640.07 412.4,2645.67 1289.04,2649.91 2498.38,2659.75 2216.54,2667.32 2976.6,2678.45 3001.2,2678.45 3072.05,2679.43 3096.65,2680.42 1514.38,2685.34 2450.16,2694.19 190.94,2696.85 2153.98,2698.13 2976.6,2703.05 2999.23,2703.05 3095.66,2704.03 1214.26,2705.02 3071.06,2705.02 412.4,2705.71 2400.96,2727.65 2494.44,2728.63 2450.16,2759.14 1528.15,2765.04 371.06,2769.68 227.36,2770.67 2344.87,2786.69 2495.42,2789.64 2400.96,2792.59 296.26,2796.26 1177.85,2795.54 1219.18,2795.54 2312.4,2797.51 1199.5,2826.05 2460,2831.95 2345.86,2846.71 1178.83,2854.58 1218.19,2855.57 2409.82,2866.39 3634.9,2870.33 3660.48,2871.31 2310.43,2888.04 2450.16,2891.98 1322.5,2906.74 2131.34,2906.74 2170.7,2906.74 1258.54,2910.67 2345.86,2911.66 1205.4,2920.51 3681.14,2920.51 1231.97,2946.1 1292.98,2947.08 1364.81,2950.03 3658.51,2953.97 3633.91,2954.95 1473.05,2955.94 1417.94,2956.92 2121.5,2961.84 2181.53,2962.82 2241.55,2962.82 2307.48,2962.82 2366.52,2963.81 1207.37,2980.54 3678.19,2980.54 1333.32,2985.46 1274.28,2987.42 1388.42,2992.34 1445.5,2992.34 3680.16,3010.06 2115.6,3016.94 2266.15,3017.93 1209.34,3025.8 1279.2,3030.72 1338.24,3030.72 1409.09,3030.72 2176.61,3041.54 1193.59,3070.08 2116.58,3072.05 2246.47,3073.03 1242.79,3075 1317.58,3080.9 1378.58,3080.9 1448.45,3080.9 1513.39,3080.9 1283.14,3135.02 1343.16,3135.02 1477.97,3135.02 1557.67,3135.02 1629.5,3135.02 1413.02,3136.99 2070.34,3147.82 1895.18,3151.75 1985.71,3151.75 2151.02,3151.75 1668.86,3156.67 1709.21,3156.67 1750.54,3156.67 1789.9,3156.67 1829.26,3157.66 1066.93,3234.25
GND3: C304.1 C305.1 C333.1 C334.1 C661.2 C662.1 C2385.2 EC2.2 EC5.2 EC6.2 J3.1 J4.2 J4.4 J4.6 J5.1 L36.1 R1347.1 R1348.2 R1364.1 R1365.2 R2559.2 U69.3 U70.3 | length 919.3
  Top Layer w20: v1(2871.06,3222.44) 2874.02,3222.44 3027.56,3375.98 v1(3027.56,3478.35)
  Bottom Layer w14: C333.1@3144.69,3549.21 3145.67,3550.2 v1(3170.28,3550.2) 3188.98,3550.2 R1364.1@3189.96,3551.18 ; U69.3@3300.2,3198.82 3304.13,3194.88 3351.38,3194.88 v1(3372.05,3215.55)
  Bottom Layer w20: U70.3@2790.35,3195.87 2843.5,3195.87 v1@2868.11,3220.47 ; v1(2984.25,3515.75) 2985.24,3516.73 C334.1@2985.24,3548.23 ; v1@3029.53,3478.35 3030.51,3479.33 C661.2@3060.04,3479.33 ; v1(3059.05,3517.72) 3060.04,3516.73 C661.2@3060.04,3479.33 ; 3097.44,3478.35 3096.46,3479.33 C661.2@3060.04,3479.33 ; R1365.2@3103.35,3587.6 3103.35,3601.38 v1(3125,3623.03) ; C305.1@3358.27,3549.21 3358.27,3536.42 3379.92,3514.76 C662.1@3379.92,3455.71 ; R1348.2@3438.98,3588.58 v1(3438.98,3619.09) ; v1(3560.04,3518.7) R1347.1@3560.04,3550.2 ; v1(3600.39,3517.72) C304.1@3600.39,3549.21
  other v1: 3291.48,1313.64 3267.86,1314.62 3293.45,1338.24 3268.85,1339.22 3267.86,1395.31 3293.45,1396.3 3292.46,1419.91 3267.86,1420.9 3357.41,1434.67 3383.98,1434.67 3357.41,1460.26 3382.01,1460.26 3444.98,1485.84 3468.6,1487.81 3267.86,1488.79 3292.46,1490.76 3444,1509.46 3469.58,1510.44 3268.85,1514.38 3294.43,1515.36 3404.64,3396.77 3444,3406.61 3375.12,3416.45 3420.38,3433.18 3444.98,3451.87 3088.58,3478.35
GNDA: C325.2 C2385.1 pad.1 pad.2 pad.3 pad.4 R2558.1 R2559.1 | length 3687.7
  Top Layer w30: 110.21,1231.97 365.06,977.11 ; 123.98,3580.78 347.35,3357.41 ; 129.89,3348.55 349.32,3567.98 ; 131.86,983.02 343.42,1194.58 ; 3697.87,3561.1 3935.02,3323.95 ; 3698.86,1197.53 3909.43,986.95 ; 3704.76,3369.22 3921.24,3585.7 ; 3708.7,1009.58 3912.38,1213.27
  Bottom Layer w30: 3678.19,977.11 3914.35,1213.27 ; 3702.79,1195.56 3907.46,990.89 ; 3711.65,3549.29 3913.37,3347.57 ; 3714.6,3380.04 3902.54,3567.98
  other v1: 86.59,856.08 86.59,958.42 86.59,1059 86.59,1156.2 86.59,1257.55 85.61,1355.95 85.61,1457.3 85.61,1560.62 85.61,1657.06 84.62,1756.44 84.62,1857 85.61,1957.18 85.61,2056.56 85.61,2157 86.59,2257.3 86.59,2358.65 86.59,2458.03 85.61,2554.46 86.59,2656.8 85.61,2757 86.59,2855.57 86.59,2955.94 84.62,3058.27 84.62,3159 85.61,3258.02 185.02,3259.99
GNDADC_0: C327.2 C664.1 C856.1 C856A.1 FB14.2 R2471.1 R2487.1 U31.J10 U31.K10 | length 1586.6
  Top Layer w14: v1(1845.47,1531.5) 1859.77,1517.2 U31.J10@1891.47,1517.2
  Bottom Layer w12: C856.1@1149.61,999.02 1148.62,999.02 1064.96,1082.68 1064.96,1375 1158.46,1468.5 1405.51,1468.5 1421.26,1484.25 1486.22,1484.25 1504.24,1502.27 1661.12,1502.27 1670.28,1493.11 1706.69,1493.11 C664.1@1714.57,1485.24 ; C664.1@1715.55,1486.22 1717.52,1486.22 1739.17,1507.87 1821.85,1507.87 1850.39,1536.42 C327.2@1869.09,1536.42
  Bottom Layer w20: C856.1@1150.59,995.08 C856A.1@1150.59,937.01 1150.59,865.16 1149.61,864.17 1158.46,855.31 1206.69,855.31 1211.61,860.24 FB14.2@1211.61,900.59
IN: C291.1 C292.1 C293.2 C306.1 C307.1 C308.1 C309.1 C310.1 C319.1 C320.1 C321.1 C322.1 C323.1 C384.2 C387.1 C389.2 C391.1 C394.2 C396.1 C398.2 C401.2 C403.2 D21.2 D22.2 D23.2 D24.2 R1413.1 R1482.2 R2599.1 R2800.1 U22.3 U26.3 U27.3 U28.3 | length 235.9
  Top Layer w14: v1(187.99,1740.16) R2599.1@219.49,1740.16
  Bottom Layer w14: v1@302.17,1893.7 R2800.1@340.55,1893.7 ; R1413.1@548.23,1051.18 548.23,890.75 C387.1@552.17,886.81
  other v1: 1662.96,613.03 1692.48,613.03 1718.06,622.87 1742.66,622.87 2668.61,643.54 2695.18,644.52 1717.08,647.47 1743.65,648.46 2695.18,667.15 2669.59,668.14 744.89,671.09 779.33,672.07 815.74,672.07 1717.08,672.07 1743.65,673.06 2635.15,688.8 758.66,691.75 800.98,692.74 2668.61,707.5 2694.19,707.5 743.9,721.27 785.23,722.26 814.75,723.24 2668.61,734.06 2695.18,734.06 599.26,785.23 571.7,813.77 598.27,813.77 568.75,893.47 593.35,894.46 391.63,1305.77 392.62,1332.34 388.68,1382.52 388.68,1412.04 363.1,1441.56 384.74,1468.13 302.17,1893.7 3491.23,2042.78 3464.66,2043.77 3465.65,2069.35 3491.23,2070.34 3463.68,2113.63 3490.25,2114.62 3307.22,2118.55 3332.81,2118.55 3382.99,2119.54 3409.56,2120.52 3307.22,2145.12 3332.81,2145.12 3382.01,2145.12 3411.53,2145.12 3464.66,2158.9 3491.23,2158.9 3374.14,2185.46 3464.66,2185.46 3491.23,2185.46 3348.55,2186.45 3532.56,2468.86 3558.14,2468.86 3526.66,2548.56 3556.18,2549.54 3527.64,2577.1 3526.66,2607.6 3536.5,2871.31 3566.02,2873.28 3537.48,2903.78 3535.51,2933.3 3567,2952 3537.48,2967.74 3535.51,2999.23
LED3_0: R1383.2 U24.13 U25.9 | length 2242.3
  Top Layer w6: v1(779.53,2270.67) 780.51,2271.65 U24.13@840.55,2271.65
  Bottom Layer w6: v1@777.56,2267.72 747.05,2237.2 523.62,2237.2 502.95,2257.87 502.95,2551.18 456.69,2597.44 456.69,2735.24 332.68,2859.25 332.68,3127.95 368.11,3163.39 944.88,3163.39 1030.51,3249.02 U25.9@1030.51,3401.57 ; v1(779.53,2270.67) 801.18,2270.67 R1383.2@816.93,2254.92
LED.0_0: R1390.2 U24.9 U25.11 | length 1900.1
  Top Layer w6: R1390.2@712.6,2109.25 728.35,2125 v1(728.35,2156.5) 727.81,2157.03 U24.9@727.81,2217.52
  Bottom Layer w6: U25.11@579.72,3401.57 579.72,3436.02 559.06,3456.69 465.55,3456.69 441.93,3433.07 441.93,3266.73 315.94,3140.75 315.94,2855.31 443.9,2727.36 443.9,2589.57 487.2,2546.26 487.2,2237.2 567.91,2156.5 v1@729.33,2156.5
MDC_0: R2470.2 U24.25 U31.W15 | length 1776
  Top Layer w6: U24.25@788.38,2539.37 788.38,2576.77 793.31,2581.69 v1(812.99,2581.69) 837.6,2581.69 1025.59,2393.7 1025.59,2027.56 1092.52,1960.63 1092.52,1665.35 1303.15,1454.72 1339.2,1454.72 1339.36,1454.88 1349.25,1454.88 1440.38,1363.76 1495.23,1363.76 1505.49,1363.76 1516.98,1375.25 1560.77,1375.25 U31.W15@1573.82,1362.2
  Bottom Layer w6: v1@811.02,2580.71 854.33,2580.71 R2470.2@858.27,2576.77
NetC69_1: C69.1 X3.1 Y2.1 Y2.8 | length 511.9
  Top Layer w6: C69.1@2538.39,1041.34 2538.39,1084.65 2554.13,1100.39 X3.1@2611.22,1100.39 ; Y2.1@2579.72,904.53 2579.72,862.2 2592.52,849.41 2619.09,849.41 2638.78,869.09 Y2.8@2641.73,869.09 ; X3.1@2621.06,1100.39 2651.58,1100.39 2662.4,1089.57 2662.4,891.73 Y2.8@2642.72,872.05
NetC327_1: C327.1 U31.J9 | length 47.8
  Top Layer w14: U31.J9@1891.47,1548.64 1892.15,1548.64 v1(1907.48,1563.98)
  Bottom Layer w12: v1@1906.5,1561.02 1908.46,1559.05 C327.1@1908.46,1536.42
NetC2300_2: C2300.2 C2302.1 C2383.2 C2384.2 R2537.1 R2538.1 U66.H1 U66.M8 | length 599.1
  Top Layer w12: U66.M8@1915.36,2492.13 1915.36,2494.09 v1@1930.12,2508.86 ; U66.H1@2041.34,2713.58 v1(2057.09,2729.33)
  Top Layer w14: v1(1959.65,2568.9) 2011.81,2568.9 v1(2025.59,2582.68)
  Bottom Layer w12: v1(1933.07,2507.87) 1932.09,2508.86 1932.09,2539.37 v1@1960.63,2567.91
  Bottom Layer w14: C2300.2@2046.26,2562.01 2005.91,2602.36 2030.51,2626.97 2030.51,2702.76 v1(2057.09,2729.33)
  Bottom Layer w20: v1(2057.09,2729.33) 2065.95,2738.19 2065.95,2929.13 R2538.1@2066.93,2930.12
NetDATA1_6: DATA1.6 R2483.1 | length 998.3
  Top Layer w6: R2483.1@2221.46,891.73 2221.46,868.11 2201.77,848.42 2201.77,734.25 2279.82,656.2 2610.53,656.2 2749.02,517.72 2789.37,517.72 2812.01,495.08 2812.01,428.15 2849.41,390.75 DATA1.6@2852.91,390.75
NetDATA1_8: DATA1.8 R2482.1 | length 953.8
  Top Layer w6: R2482.1@2181.1,890.75 2181.1,870.08 2162.4,851.38 2162.4,733.27 2261.46,634.2 2587.25,634.2 2734.25,487.2 2734.25,427.17 2770.67,390.75 DATA1.8@2773.95,390.75
NetDATA1_14: DATA1.14 R1488.1 | length 755.4
  Top Layer w6: R1488.1@2101.38,792.32 2101.38,724.41 2227.36,598.42 2468.5,598.42 2575.79,491.14 2575.79,429.46 DATA1.14@2537.07,390.75
NetDATA1_16: DATA1.16 R1487.1 | length 733.6
  Top Layer w6: R1487.1@2062.01,794.29 2062.01,715.55 2208.66,568.9 2437.01,568.9 2497.05,508.86 2497.05,429.68 DATA1.16@2458.12,390.75
NetDATA1_18: DATA1.18 R2480.1 | length 694.5
  Top Layer w6: R2480.1@2021.65,791.34 2021.65,703.74 2187.01,538.39 2381.89,538.39 2417.32,502.95 2417.32,428.91 DATA1.18@2379.16,390.75
NetDATA1_20: DATA1.20 R2481.1 | length 656.1
  Top Layer w6: R2481.1@1982.28,789.37 1982.28,687.99 2161.42,508.86 2321.85,508.86 2338.58,492.13 2338.58,429.13 2329.72,420.28 ; DATA1.20@2300.2,390.75 2329.72,420.27
NetDATA2_6: DATA2.6 R2493.1 | length 540
  Top Layer w6: DATA2.6@1926.73,391.73 1923.23,391.73 1886.81,428.15 1886.81,497.05 1921.26,531.5 1921.26,854.33 1940.95,874.02 R2493.1@1940.95,890.75
NetDATA2_8: DATA2.8 R2492.1 | length 554.4
  Top Layer w6: DATA2.8@1847.77,391.73 1845.47,391.73 1807.09,430.12 1807.09,503.94 1880.91,577.76 1880.91,853.35 1901.58,874.02 R2492.1@1901.58,888.78
NetDATA2_14: DATA2.14 R2506.1 | length 521.5
  Top Layer w6: DATA2.14@1610.89,391.73 1650.59,431.43 1650.59,491.14 1678.15,518.7 1732.28,518.7 1821.85,608.27 1821.85,791.34 R2506.1@1823.82,793.31
NetDATA2_16: DATA2.16 R2505.1 | length 566.5
  Top Layer w6: DATA2.16@1531.93,391.73 1570.87,430.66 1570.87,502.95 1617.13,549.21 1721.46,549.21 1781.5,609.25 1781.5,792.32 R2505.1@1780.51,793.31
NetDATA2_18: DATA2.18 R2507.1 | length 535.9
  Top Layer w6: DATA2.18@1452.98,391.73 1491.14,429.9 1491.14,502.95 1521.65,533.46 1552.17,533.46 1741.14,722.44 R2507.1@1741.14,790.35
NetDATA2_20: DATA2.20 R2504.1 | length 574
  Top Layer w6: DATA2.20@1374.02,391.73 1412.4,430.12 1412.4,489.17 1487.2,563.98 1552.17,563.98 1700.79,712.6 R2504.1@1700.79,792.32
NetDATA3_6: DATA3.6 R2510.1 | length 1061.8
  Top Layer w6: DATA3.6@999.56,392.72 995.08,392.72 960.63,427.16 960.63,513.78 979.41,532.56 1407.58,532.56 1435.91,560.88 1435.91,561.29 1641.73,767.12 1641.73,854.33 1661.42,874.02 R2510.1@1661.42,894.68
NetDATA3_8: DATA3.8 R2511.1 | length 1108.6
  Top Layer w6: DATA3.8@920.6,392.72 916.34,392.72 879.92,429.13 879.92,513.78 918.7,552.56 1396.47,552.56 1413.91,569.99 1413.91,570.4 1601.38,757.87 1601.38,855.31 1622.05,875.98 R2511.1@1622.05,894.68
NetDATA3_14: DATA3.14 R1492.1 | length 1101.3
  Top Layer w6: DATA3.14@683.73,392.72 686.02,392.72 722.44,429.13 722.44,510.83 794.17,582.56 1379.01,582.56 1540.35,743.9 R1492.1@1540.35,795.28
NetDATA3_16: DATA3.16 R1491.1 | length 1143.4
  Top Layer w6: DATA3.16@604.77,392.72 606.3,392.72 643.7,430.12 643.7,516.73 729.53,602.56 1365.76,602.56 1500.98,737.78 R1491.1@1500.98,791.34
NetDATA3_18: DATA3.18 R2509.1 | length 1198.2
  Top Layer w6: DATA3.18@525.81,392.72 529.53,392.72 564.96,428.15 564.96,532.48 655.04,622.56 1354.65,622.56 1461.61,729.52 R2509.1@1461.61,791.34
NetDATA3_20: DATA3.20 R2508.1 | length 1227.4
  Top Layer w6: DATA3.20@451.77,397.64 485.24,431.1 485.24,522.64 605.16,642.56 1338.43,642.56 1420.28,724.41 R2508.1@1420.28,794.29
NetJ3_2: C305.2 J3.2 L9.1 | length 201.8
  Bottom Layer w30: 3504.02,3680.16 3580.78,3756.91 ; 3510.91,3751.99 3576.84,3686.06
NetJ3_3: J3.3 R1345.2 | length 253.6
  Bottom Layer w6: R1345.2@3479.33,3588.58 3479.33,3614.17 3488.19,3623.03 3599.41,3623.03 3646.65,3670.28 J3.3@3646.65,3707.68
NetJ3_4: C304.2 J3.4 R1346.2 R1347.2 | length 272.8
  Bottom Layer w6: R1346.2@3519.69,3587.6 3612.2,3587.6 3736.22,3711.61 J3.4@3741.14,3711.61
NetJ5_2: C334.2 J5.2 L11.1 | length 165.6
  Bottom Layer w30: 2994.31,3688.03 3062.21,3755.93 ; J5.2@3010.06,3740.18 3059.26,3690.98
NetJ5_3: J5.3 R1362.2 | length 188.7
  Bottom Layer w6: R1362.2@3023.62,3588.58 3023.62,3611.22 3062.01,3649.61 3106.3,3649.61 3133.86,3677.17 J5.3@3133.86,3705.71